# EAGLE board daughter (EAGLE 4.11)

Size 96.51 x 53.97 mm. Coordinates in mm from the lower left corner, seen from the top.
Outline: 0,0 96.51,0 96.51,53.96 0,53.96 0,0
Copper layers (1*16): Top 0.035mm / dielectric 1.5mm / Bottom 0.035mm
Design rules "northtech": minimum track width 12mil, minimum drill 24mil, track to track 8mil, track to pad 8mil, pad to pad 8mil, via to via 8mil, smd to smd 8mil, copper to edge 35mil, drill to drill 8mil, minimum pad ring 10mil, minimum via ring 8mil, stop-mask expansion 4mil, vias tented up to drill 0mil, thermal gap 10mil
Net classes: 0 default: width 0.356 mm, clearance 0.711 mm; 1 power: width 0.711 mm, clearance 0.711 mm

## Footprints (pad centres in the part's own frame; a part is rotated, then mirrored left to right if it is on the bottom)
FE12-2 = drill 0.914 round: 1 -13.97,1.27 | drill 0.914 octagon: 2 -13.97,-1.27; 3 -11.43,1.27; 4 -11.43,-1.27; 5 -8.89,1.27; 6 -8.89,-1.27; 7 -6.35,1.27; 8 -6.35,-1.27; 9 -3.81,1.27; 10 -3.81,-1.27; 11 -1.27,1.27; 12 -1.27,-1.27; 13 1.27,1.27; 14 1.27,-1.27; 15 3.81,1.27; 16 3.81,-1.27; 17 6.35,1.27; 18 6.35,-1.27; 19 8.89,1.27; 20 8.89,-1.27; 21 11.43,1.27; 22 11.43,-1.27; 23 13.97,1.27; 24 13.97,-1.27

## Placement (x,y rotation side)
CON1  2x12pin 2.54mm  [FE12-2]  92.7,17.14 90 top
CON2  2x12pin 2.54mm  [FE12-2]  3.8,17.14 90 top

## Library data of the parts
CON1 CON2 = david

## Nets
A0: CON1.10
A1: CON1.9
A2: CON1.12
A3: CON1.11
A4: CON1.14
A5: CON1.13
B0: CON2.13
B1: CON2.14
B2: CON2.11
B3: CON2.12
B4: CON2.9
B5: CON2.10
B6: CON2.7
B7: CON2.8
C0: CON1.16
C1: CON1.15
C2: CON1.18
C3: CON1.17
C4: CON2.17
C5: CON2.18
C6: CON2.15
C7: CON2.16
D0: CON1.20
D1: CON1.19
D2: CON2.23
D3: CON2.24
D4: CON2.21
D5: CON2.22
D6: CON2.19
D7: CON2.20
E0: CON1.22
E1: CON1.21
E2: CON1.24
GND [power]: CON1.5 CON1.23
MCLR#: CON1.6
SIG0: CON2.6
SIG1: CON2.5
TOP0: CON2.2
TOP1: CON2.1
TOP2: CON2.4
TOP3: CON2.3
TOP4: CON1.2
TOP5: CON1.1
TOP6: CON1.4
TOP7: CON1.3
VCC [power]: CON1.7
VREG_IN [power]: CON1.8

## Tracks (layer width: path | path; a pad name or v marks a point on that pad's centre or on a via)
GND  (1 unrouted)